# EAGLE board HW4 (EAGLE 9.6.2)
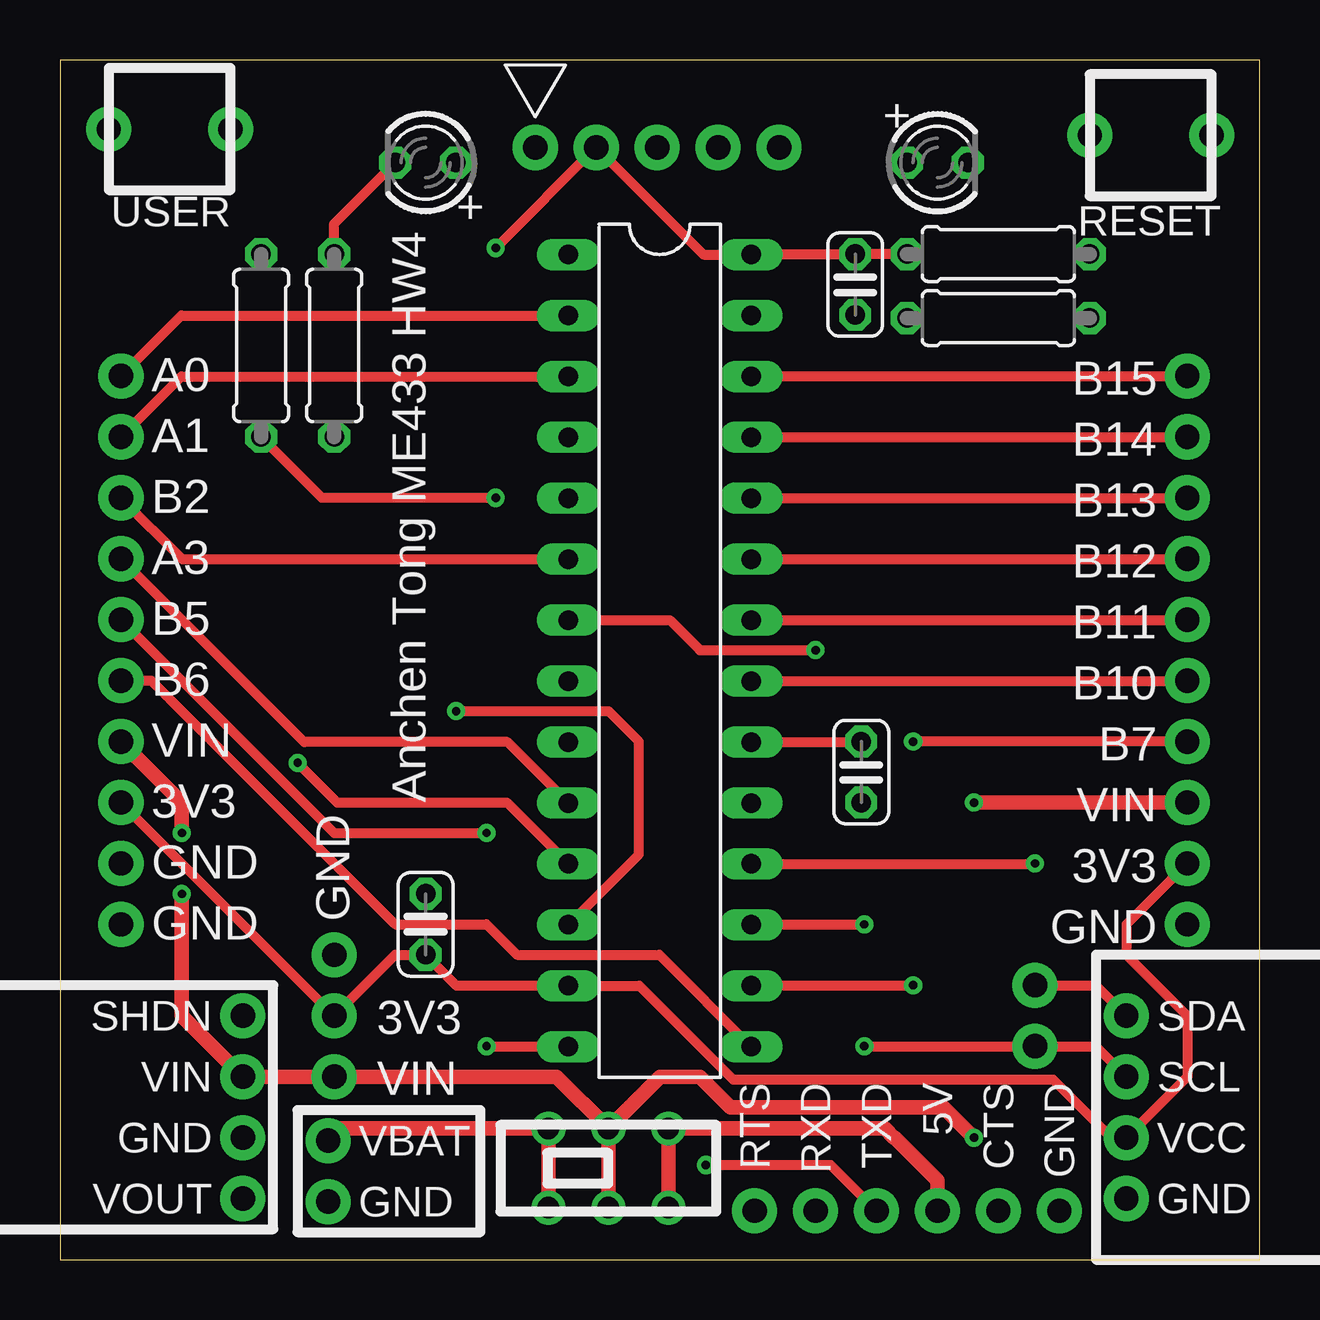
[diagram p0: board, top side]
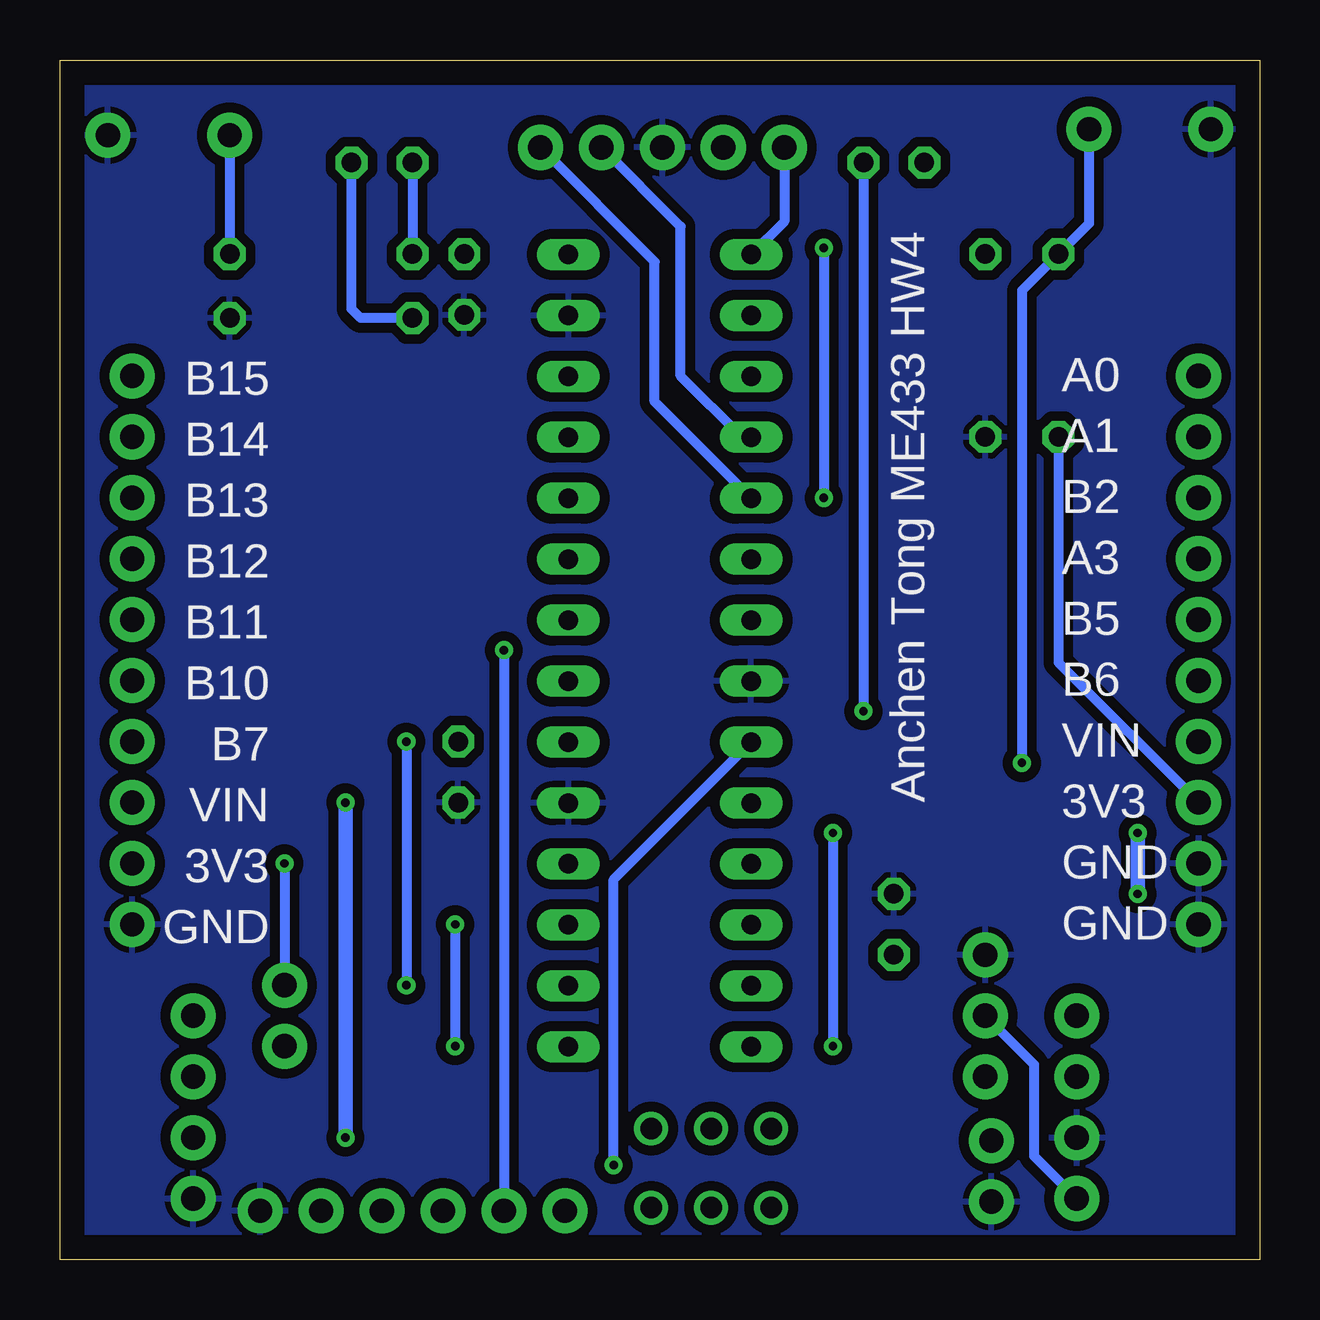
[diagram p1: board, bottom side, seen from below]

Size 50 x 50 mm. Coordinates in mm from the lower left corner, seen from the top.
Outline: 0,0 50,0 50,50 0,50 0,0
Copper layers (1*16): Top 0.035mm / dielectric 1.5mm / Bottom 0.035mm
Design rules "default": minimum track width 6mil, minimum drill 0.35mm, track to track 6mil, track to pad 6mil, pad to pad 6mil, via to via 6mil, smd to smd 6mil, copper to edge 40mil, drill to drill 6mil, minimum pad ring 10mil, minimum via ring 8mil, stop-mask expansion 4mil, vias tented up to drill 0mil, thermal gap 10mil

## Footprints (pad centres in the part's own frame; a part is rotated, then mirrored left to right if it is on the bottom)
C025-024X044 = drill 0.813 octagon: 1 -1.27,0; 2 1.27,0
LED3MM = drill 0.813 octagon: A -1.27,0; K 1.27,0
0207/7 = drill 0.813 octagon: 1 -3.81,0; 2 3.81,0
DIL28-3 = drill 0.813 long: 1 -16.51,-3.81; 2 -13.97,-3.81; 3 -11.43,-3.81; 4 -8.89,-3.81; 5 -6.35,-3.81; 6 -3.81,-3.81; 7 -1.27,-3.81; 8 1.27,-3.81; 9 3.81,-3.81; 10 6.35,-3.81; 11 8.89,-3.81; 12 11.43,-3.81; 13 13.97,-3.81; 14 16.51,-3.81; 15 16.51,3.81; 16 13.97,3.81; 17 11.43,3.81; 18 8.89,3.81; 19 6.35,3.81; 20 3.81,3.81; 21 1.27,3.81; 22 -1.27,3.81; 23 -3.81,3.81; 24 -6.35,3.81; 25 -8.89,3.81; 26 -11.43,3.81; 27 -13.97,3.81; 28 -16.51,3.81
BATTERY = drill 1.016 pad 1.88: 1 -1.27,0; 2 1.27,0
SLIDE = drill 0.9: 1 -2.5,-1.65; 2 0,-1.65; 3 2.5,-1.65; 4 2.5,1.65; 5 0,1.65; 6 -2.5,1.65
VREG = drill 1.016 pad 1.88: 1 -3.81,0; 2 -1.27,0; 3 1.27,0; 4 3.81,0
USB_TO_UART = drill 1.016 pad 1.88: 1 -6.35,0; 2 -3.81,0; 3 -1.27,0; 4 1.27,0; 5 3.81,0; 6 6.35,0
MPLAB_SNAP = drill 1.016 pad 1.88: 1 -5.08,0; 2 -2.54,0; 3 0,0; 4 2.54,0; 5 5.08,0
DISPLAY = drill 1.016 pad 1.88: 1 0,-3.81; 2 0,-1.27; 3 0,1.27; 4 0,3.81
BUTTON = drill 1.016 pad 1.88: 1 -2.54,0; 2 2.54,0
ONE = drill 1.016 pad 1.88: P$1 0,0
FIVE = drill 1.016 pad 1.88: 1 -5.08,0; 2 -2.54,0; 3 0,0; 4 2.54,0; 5 5.08,0

## Placement (x,y rotation side)
C1  0.1uF  [C025-024X044]  15.24,13.97 90 top
C2  0.1uF  [C025-024X044]  33.15,40.64 270 top
C3  10uF  [C025-024X044]  33.4,20.32 270 top
LED1  RED  [LED3MM]  36.58,45.72 0 top
LED2  GREEN  [LED3MM]  15.24,45.72 180 top
R1  330  [0207/7]  39.12,39.24 180 top
R2  330  [0207/7]  11.43,38.1 90 top
R3  10K  [0207/7]  39.12,41.91 180 top
R4  10K  [0207/7]  8.38,38.1 270 top
U$1  PIC31MX170F256B  [DIL28-3]  25,25.38 270 top
U$2  BATTERY  [BATTERY]  11.18,3.68 90 top
U$3  SLIDE  [SLIDE]  22.86,3.81 0 top
U$4  VREG  [VREG]  7.62,6.35 90 top
U$5  USB_TO_UART  [USB_TO_UART]  35.31,2.03 180 top
U$6  MPLAB_SNAP  [MPLAB_SNAP]  24.89,46.35 0 top
U$7  DISPLAY  [DISPLAY]  44.45,6.35 0 top
U$8  RESET  [BUTTON]  45.47,46.86 0 top
U$9  USER  [BUTTON]  4.57,47.12 180 top
U$10  ONE  [ONE]  40.64,11.43 0 top
U$11  ONE  [ONE]  40.64,8.89 0 top
U$12  FIVE  [FIVE]  46.99,31.75 270 top
U$13  FIVE  [FIVE]  46.99,19.05 270 top
U$14  FIVE  [FIVE]  2.54,19.05 270 top
U$15  FIVE  [FIVE]  2.54,31.75 270 top
U$16  ONE  [ONE]  11.43,12.7 0 top
U$17  ONE  [ONE]  11.43,10.16 0 top
U$18  ONE  [ONE]  11.43,7.62 0 top

## Library data of the parts
C1-C3 = PIC32MX170F256B; SPICEPREFIX: C
LED1 LED2 U$1-U$18 = PIC32MX170F256B
R1-R4 = PIC32MX170F256B; SPICEPREFIX: R

## Nets
+3V3: C1.1 C2.1 LED1.A R3.2 R4.2 U$1.13 U$1.28 U$4.1 U$6.2 U$7.2 U$13.4 U$14.3 U$17.P$1
+5V: U$3.3 U$3.4 U$5.3
A0: U$1.2 U$15.1
A1: U$1.3 U$15.2
A3: U$1.10 U$15.4
A4: LED2.A U$1.12
B2: U$1.6 U$15.3
B4: R4.1 U$1.11 U$9.1
B5: U$1.14 U$15.5
B6: U$1.15 U$14.1
B7: U$1.16 U$13.2
B10: U$1.21 U$13.1
B11: U$1.22 U$12.5
B12: U$1.23 U$12.4
B13: U$1.24 U$12.3
B14: U$1.25 U$12.2
B15: U$1.26 U$12.1
GND: C1.2 C2.2 C3.2 R1.1 R2.1 U$1.8 U$1.19 U$1.27 U$2.1 U$4.2 U$5.1 U$6.3 U$7.1 U$8.2 U$9.2 U$13.5 U$14.4 U$14.5 U$16.P$1
MCLR: U$1.1 U$6.1
N$1: U$2.2 U$3.1 U$3.6
N$2: LED1.K R1.2
N$4: LED2.K R2.2
N$5: C3.1 U$1.20
PGC: U$1.5 U$6.5
PGD: U$1.4 U$6.4
SCL: U$1.17 U$7.3 U$11.P$1
SDA: U$1.18 U$7.4 U$10.P$1
U1RX: U$1.9 U$5.4
U1TX: U$1.7 U$5.5
VCLR: R3.1 U$8.1
VIN: U$3.2 U$3.5 U$4.3 U$13.3 U$14.2 U$18.P$1

## Tracks (layer width: path | path; a pad name or v marks a point on that pad's centre or on a via)
+3V3  (via drill 0.35)
  Top 0.406: R3.2 C2.1 33.13,41.89 U$1.28 26.82,41.89 U$6.2 v18.16,42.16 | R4.2 10.92,31.75 v18.16,31.75 | U$13.4 44.45,13.97 44.45,12.7 46.99,10.16 46.99,7.62 U$7.2 43.81,5.08 41.4,7.49 28.07,7.49 24.15,11.41 U$1.13 16.53,11.41 C1.1 13.97,12.7 U$17.P$1 U$14.3
  Bottom 0.406: LED1.A R3.2 | R4.2 8.38,24.89 U$14.3 | v18.16,42.16 v18.16,31.75 | U$17.P$1 9.4,8.13 9.4,4.32 U$4.1
+5V
  Top 0.61: U$3.3 U$3.4 34.38,5.46 34.76,5.08 34.8,5.08 36.58,3.3 U$5.3
A0
  Top 0.406: U$15.1 5.06,39.35 U$1.2
A1
  Top 0.406: U$15.2 5.06,36.81 U$1.3
A3
  Top 0.406: U$1.10 18.65,21.57 10.18,21.57 U$15.4
A4  (via drill 0.35)
  Top 0.406: v16.51,22.86 22.86,22.86 24.13,21.59 24.13,16.89 U$1.12
  Bottom 0.406: LED2.A v16.51,22.86
B2
  Top 0.406: U$1.6 5.1,29.19 U$15.3
B4  (via drill 0.35)
  Top 0.406: v9.91,20.7 11.56,19.05 18.63,19.05 U$1.11
  Bottom 0.406: U$9.1 7.11,43.18 R4.1 9.91,40.39 9.91,35.56 9.91,35.01 v9.91,20.7
B5  (via drill 0.35)
  Top 0.406: U$15.5 11.43,17.78 v17.78,17.78 | v17.78,8.89 21.17,8.89 U$1.14
  Bottom 0.406: v17.78,17.78 v17.78,8.89
B6
  Top 0.406: U$1.15 24.98,12.7 19.05,12.7 17.78,13.97 13.97,13.97 3.81,24.13 U$14.1
B7  (via drill 0.35)
  Top 0.406: U$13.2 v35.56,21.59 | v35.56,11.43 35.54,11.41 U$1.16
  Bottom 0.406: v35.56,21.59 v35.56,11.43
B10
  Top 0.406: U$1.21 46.97,24.11 U$13.1
B11
  Top 0.406: U$1.22 46.97,26.65 U$12.5
B12
  Top 0.406: U$1.23 46.97,29.19 U$12.4
B13
  Top 0.406: U$1.24 46.97,31.73 U$12.3
B14
  Top 0.406: U$1.25 28.83,34.29 U$12.2
B15
  Top 0.406: U$1.26 28.83,36.83 U$12.1
GND
  pour Bottom (isolate 0.406): -1.27,-1.27 50.8,-1.27 50.8,50.8 -1.27,50.8
MCLR
  Bottom 0.406: U$6.1 19.81,43.27 U$1.1
N$1
  Top 0.61: U$3.1 U$3.6 11.68,5.46 U$2.2
N$2
  Bottom 0.406: 38.1,45.47 LED1.K 37.85,39.62 37.47,39.24 R1.2
N$4
  Top 0.406: R2.2 11.43,43.18 LED2.K
N$5
  Top 0.406: U$1.20 33.38,21.57 C3.1
PGC
  Bottom 0.406: U$1.5 25.21,35.75 25.21,41.59 U$6.5
PGD
  Bottom 0.406: U$1.4 21.57,34.27 24.13,36.83 24.13,43.05 U$6.4
SCL  (via drill 0.35)
  Top 0.406: U$1.17 28.83,13.97 v33.53,13.97 | v33.53,8.89 U$11.P$1 43.18,8.89 U$7.3
  Bottom 0.406: v33.53,13.97 v33.53,8.89
SDA  (via drill 0.35)
  Top 0.406: U$1.18 40.62,16.49 v40.64,16.51 | U$10.P$1 43.18,11.43 U$7.4
  Bottom 0.406: v40.64,16.51 U$10.P$1
U1RX  (via drill 0.35)
  Top 0.406: U$5.4 32.13,3.94 v26.92,3.94
  Bottom 0.406: v26.92,3.94 26.92,15.84 U$1.9
U1TX  (via drill 0.35)
  Top 0.406: U$1.7 25.42,26.65 26.67,25.4 v31.5,25.4
  Bottom 0.406: v31.5,25.4 U$5.5
VCLR
  Bottom 0.406: U$8.1 R3.1
VIN  (via drill 0.35)
  Top 0.61: U$3.2 U$3.5 | U$3.5 20.7,7.62 U$18.P$1 U$4.3 5.08,10.16 v5.08,15.24 | U$3.5 25.02,7.62 26.67,7.62 27.94,6.35 36.83,6.35 v38.1,5.08 | v38.1,19.05 U$13.3 | U$14.2 5.08,19.05 v5.08,17.78
  Bottom 0.61: v38.1,5.08 v38.1,19.05 | v5.08,17.78 v5.08,15.24

## Text on the board
tPlace: + | + | B15 | A0 | B14 | A1 | B13 | B2 | B12 | A3 | B11 | B5 | B10 | B6 | B7 | VIN | VIN | Anchen Tong ME433 HW4 | 3V3 | 3V3 | GND | GND | GND | GND | 3V3 | VIN
bPlace: B15 | A0 | B14 | A1 | B13 | B2 | B12 | A3 | B11 | B5 | B10 | B6 | B7 | VIN | VIN | Anchen Tong ME433 HW4 | 3V3 | 3V3 | GND | GND | GND